# Altium PCB PCB1.PcbDoc
Units mil, origin at the board's own origin, x right, y up, seen from the top; angles counter-clockwise.
Board outline 2075 x 2850 mil, 2 copper layers (Top Layer, Bottom Layer); 26 components, 15 nets, 93 pads, 16 vias.
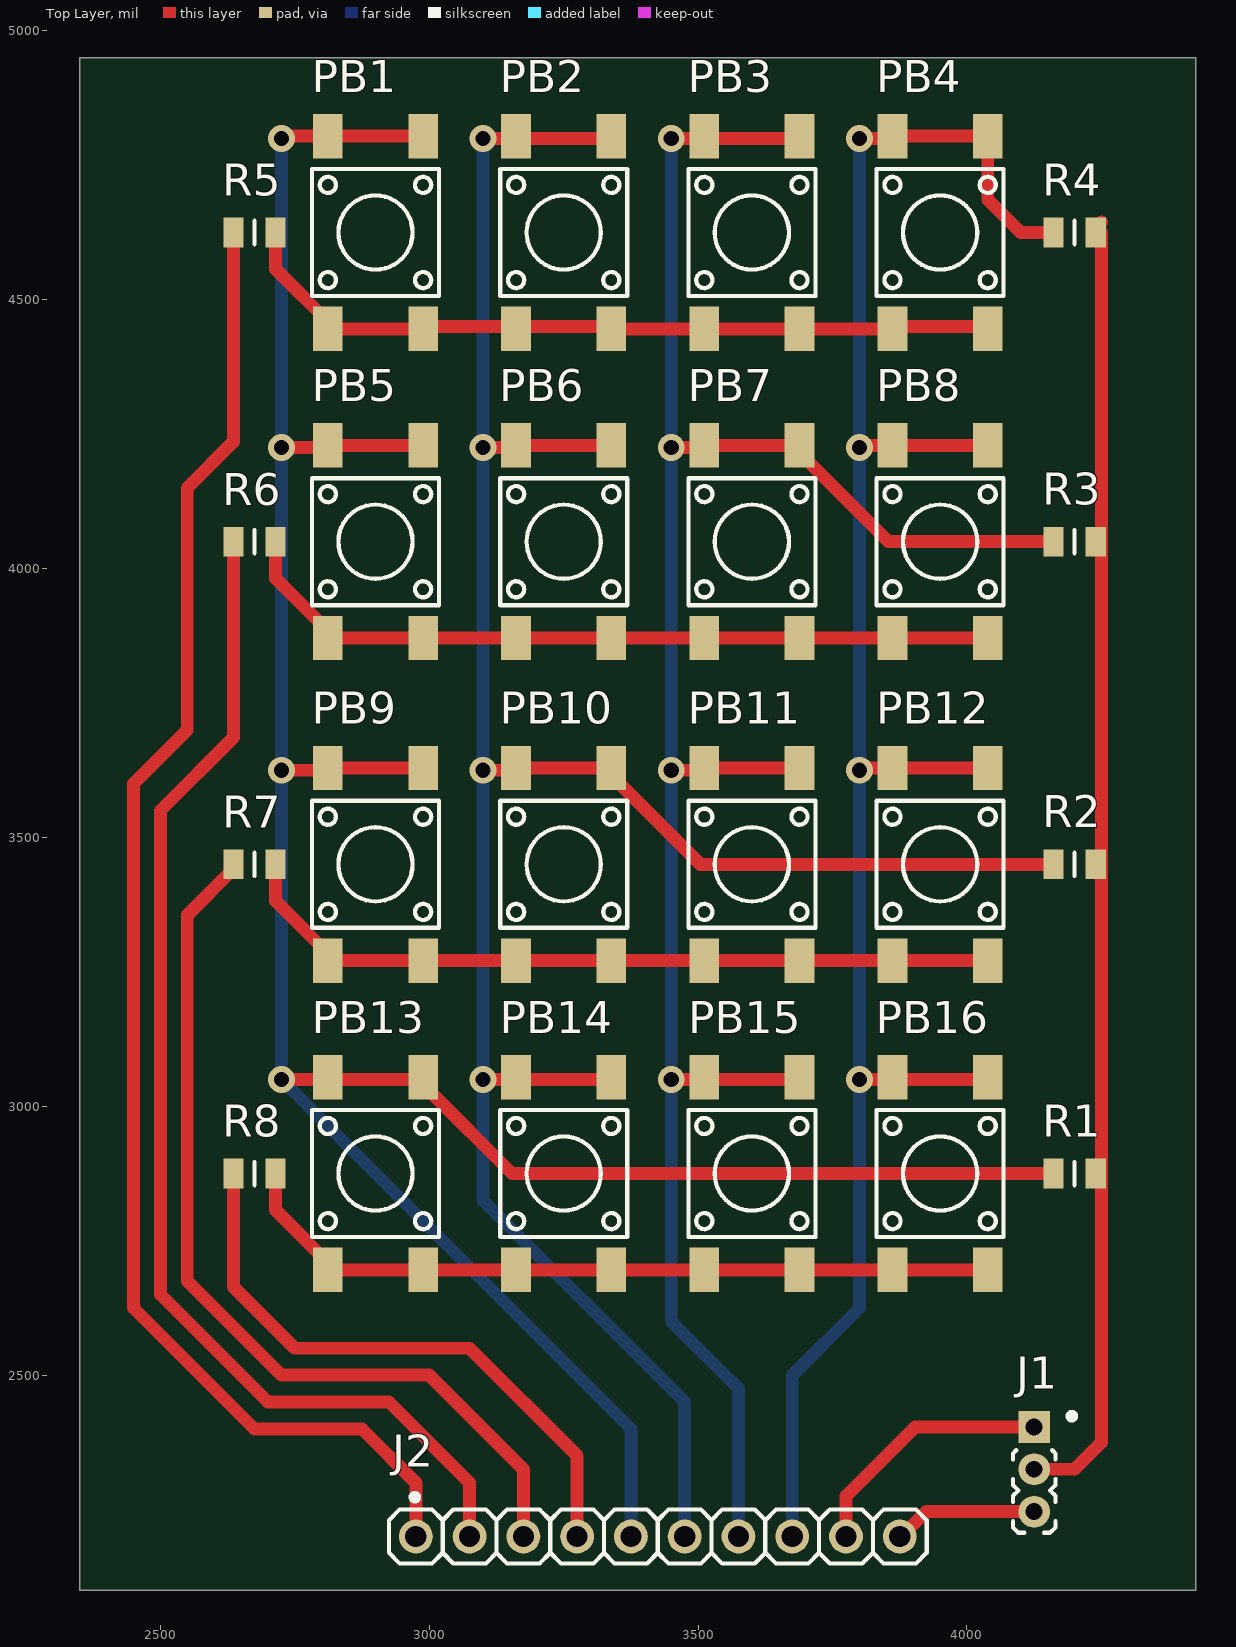
[diagram p0: Top Layer view]
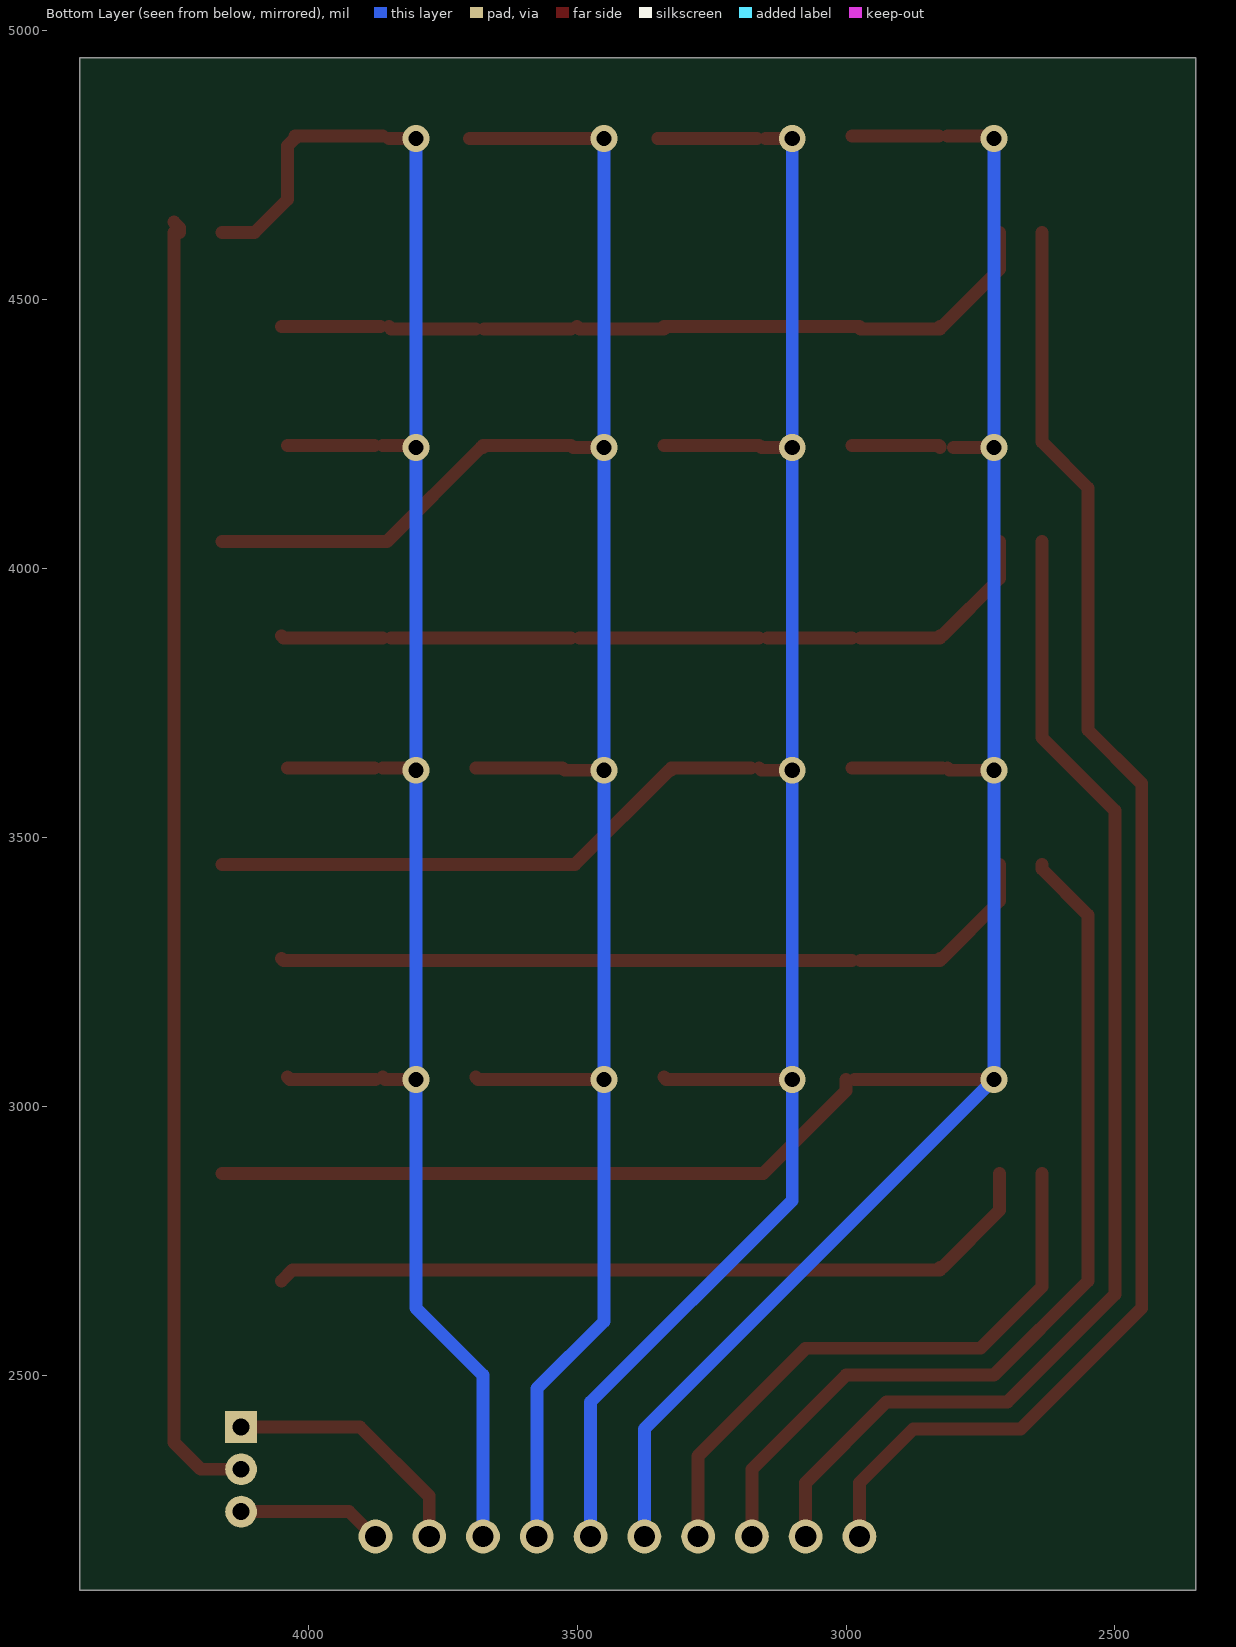
[diagram p1: Bottom Layer view, seen from below]
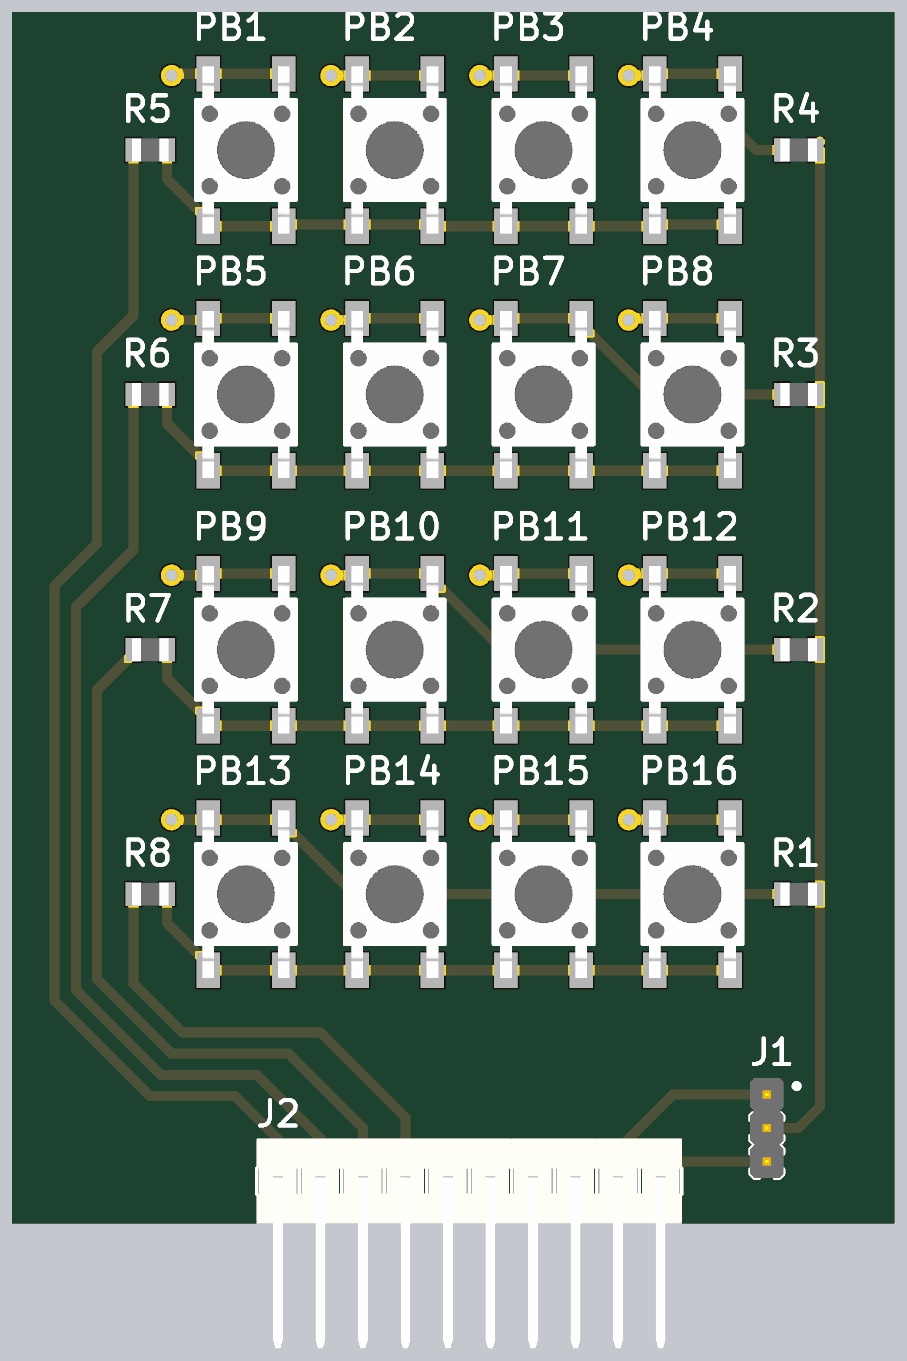
[diagram p2: 3D render of the assembled board from above, using the file's embedded part models]

## Layer stack, top to bottom
Top Solder: solder mask 0.4, Solder Resist, Dk 3.5
Top Layer: signal copper 1.4
Dielectric 1: dielectric 12.6, FR-4, Dk 4.8
Bottom Layer: signal copper 1.4
Bottom Solder: solder mask 0.4, Solder Resist, Dk 3.5

## Board outline
2350,2100 2350,4950 4425,4950 4425,2100

## Design rules (kind name [scope] priority, off if disabled: settings)
Clearance [All] p1: gap=10 ignorepadtopadclearanceinfootprint=FALSE except(0: Arc-Hole Track-Hole SMDPad-Hole THPad-Hole Via-Hole Fill-Hole Poly-Hole Region-Hole Text-Hole)
PolygonConnect [All] p1: connectstyle=Relief reliefconductorwidth=10 reliefentries=4 polygonreliefangle="90 Angle" airgapwidth=10
RoutingVias [All] p1: holewidth=28 width=50 viastyle="Through Hole" minholewidth=28 minwidth=50 maxholewidth=28 maxwidth=50
SolderMaskExpansion [All] p1: expansion=4 istentingtop=FALSE
Width [All] p1: maxlimit=50 minlimit=10 preferedwidth=24 minimp=50.000000 maximp=50.000000 favimp=50.000000
30 further rules are at their usual default settings.

## Components (designator, comment, footprint, x,y, rotation, side; value= is the part's Value field where it differs from the comment)
J1 "" HARWIN_M22-2010305 4125,2403.74 r270 top
J2 "" SIP10 2975,2200 r0 top
PB1 "" PB_TYCO_FSM6JSMA 2900,4625 r0 top
PB2 "" PB_TYCO_FSM6JSMA 3250,4625 r0 top
PB3 "" PB_TYCO_FSM6JSMA 3600,4625 r0 top
PB4 "" PB_TYCO_FSM6JSMA 3950,4625 r0 top
PB5 "" PB_TYCO_FSM6JSMA 2900,4050 r0 top
PB6 "" PB_TYCO_FSM6JSMA 3250,4050 r0 top
PB7 "" PB_TYCO_FSM6JSMA 3600,4050 r0 top
PB8 "" PB_TYCO_FSM6JSMA 3950,4050 r0 top
PB9 "" PB_TYCO_FSM6JSMA 2900,3450 r0 top
PB10 "" PB_TYCO_FSM6JSMA 3250,3450 r0 top
PB11 "" PB_TYCO_FSM6JSMA 3600,3450 r0 top
PB12 "" PB_TYCO_FSM6JSMA 3950,3450 r0 top
PB13 "" PB_TYCO_FSM6JSMA 2900,2875 r0 top
PB14 "" PB_TYCO_FSM6JSMA 3250,2875 r0 top
PB15 "" PB_TYCO_FSM6JSMA 3600,2875 r0 top
PB16 "" PB_TYCO_FSM6JSMA 3950,2875 r0 top
R1 "10K" RESC2012X60N 4200,2875 r0 top
R2 "10K" RESC2012X60N 4200,3450 r0 top
R3 "10K" RESC2012X60N 4200,4050 r0 top
R4 "10K" RESC2012X60N 4200,4625 r0 top
R5 "330" RESC2012X60N 2675,4625 r180 top
R6 "330" RESC2012X60N 2675,4050 r180 top
R7 "330" RESC2012X60N 2675,3450 r180 top
R8 "330" RESC2012X60N 2675,2875 r180 top

## Footprints (in the part's own frame and the unit in brackets; to place one, negate y for a bottom-side part, rotate by r counter-clockwise, add the part's x,y. Pads: shape width x height; smd on the part's side, far side on the other; paste and mask are expansions set on the pad)
HARWIN_M22-2010305 [mm] "3 Contacts - Pitch 2mm - Single Row Through Mount Straight Header (Post Lead = 3.5mm, Tail Lead 3.4mm, Insulator 1.5mm)"
  rect 1.5x1.5 hole 0.8: 1(0,0)
  round 1.5 hole 0.8: 2(2,0) 3(4,0)
  silkscreen extent -0.66,-1 5,1.93, body extent -1,-1 5,1, height 5
PB_TYCO_FSM6JSMA [mm] "Body 6mm x 6mm, Surface Mount Tactile Switches, TYCO FSM6JSMA Series"
  rect 1.4x2.1 smd: 1(-2.25,4.55) 2(-2.25,-4.55) 3(2.25,4.55) 4(2.25,-4.55)
  silkscreen extent -3,-3 3,3, body extent -3,-5 3,5, height 7.11
RESC2012X60N [mm] "Chip Resistor, EIA 0805, Metric 2012, Body 2.0x1.2mm, IPC Medium Density"
  rect 0.95x1.4 smd: 1(-1,0) 2(1,0)
  silkscreen extent 0,-0.55 0,0.55, body extent -1.1,-0.67 1.1,0.68, height 0.6
SIP10 [mm] "10 Contact 2.54mm Pitch Single-In-Line Header Strip - Top Pin Ø0.46mm - Bottom Pin Ø0.69mm"
  round 1.6 hole 1: 1(0,0) 2(2.54,0) 3(5.08,0) 4(7.62,0) 5(10.16,0) 6(12.7,0) 7(15.24,0) 8(17.78,0) 9(20.32,0) 10(22.86,0)
  silkscreen extent -1.27,-1.27 24.13,2, body extent -1.27,-10 24.13,2.54, height 4.5

## Part data
J1: library part "Connector 3 Male", "Connector 3 Male"
J2: library part "Connector 10 Male", "Connector 10 Male"
PB1 PB2 PB3 PB4 PB5 PB6 PB7 PB8 PB9 PB10 PB11 PB12 PB13 PB14 PB15 PB16: library part "PB SPST 1NO-2NO 34CASE", "Push-Button Switch SPDT"
R1 R2 R3 R4 R5 R6 R7 R8: library part Resistor, "Resistor"

## Via types
v1: diameter 50, hole 28, Top Layer to Bottom Layer, 16 vias

## Nets (pads, with @x,y where several pads share a name; then routed paths per layer and width w, separated by ;. In a path a pad name is that pad's centre, name@x,y a point inside that pad or via, vN(x,y) a via of type N, cw(c..) or ccw(c..) an arc to the next point about the centre after c; other vN are vias at no path point)
GND: J1.1 J2.9 | length 478.3
  Top Layer w24: J2.9 3775,2275 3903.74,2403.74 J1.1
NetJ1_2: J1.2 R1.2 R2.2 R3.2 R4.2 | length 2419.6
  Top Layer w24: J1.2 4200,2325 4250,2375 4250,3450 4250,4050 R4.2@4250,4625 ; R4.2 4239.37,4633.86 R4.2@4250,4644.49
NetJ2_1: J2.1 R5.2 | length 2836.5
  Top Layer w24: R5.2 2635.63,4235.63 2550,4150 2550,3700 2450,3600 2450,2625 2675,2400 2875,2400 2975,2300 J2.1
NetJ2_2: J2.2 R6.2 | length 2276.2
  Top Layer w24: R6.2 2635.63,3685.63 2500,3550 2500,2650 2700,2450 2925,2450 3075,2300 J2.2
NetJ2_3: J2.3 R7.2 | length 1705.4
  Top Layer w24: R7.2 2635.63,3441.14 2550,3355.51 2550,2675 2725,2500 3000,2500 3175,2325 J2.3
NetJ2_4: J2.4 R8.2 | length 1130.2
  Top Layer w24: R8.2 2635.63,2664.37 2750,2550 3075,2550 3275,2350 J2.4
NetJ2_5: J2.5 PB1.1 PB1.3 PB5.1 PB5.3 PB9.1 PB9.3 PB13.1 PB13.3 R1.1 | length 5121.3
  Top Layer w24: v1(2725,3050) PB13.3@2984.45,3050 ; v1(2725,3625) 2807.28,3625 PB9.1 ; v1(2725,4225) PB5.1@2800,4225 ; v1(2725,4800) 2729.13,4804.13 PB1.1 ; PB9.1@2820.87,3629.13 PB9.3 ; PB5.1@2825,4225 2825,4227.16 2826.98,4229.13 PB5.3 ; PB1.1@2826.98,4804.13 PB1.3 ; PB13.3@3000,3050 3000,3028.94 3153.94,2875 R1.1
  Bottom Layer w24: v1(2725,4800) v1(2725,4225) v1(2725,3625) v1(2725,3050) 3375,2400 J2.5
NetJ2_6: J2.6 PB2.1 PB2.3 PB6.1 PB6.3 PB10.1 PB10.3 PB14.1 PB14.3 R2.1 | length 4589.6
  Top Layer w24: v1(3100,3050) 3334.45,3050 PB14.3 ; v1(3100,3625) 3157.28,3625 PB10.1 ; v1(3100,4225) 3157.28,4225 PB6.1 PB6.3 ; v1(3100,4800) PB2.1@3150,4800 ; PB2.1@3165.55,4800 PB2.3@3350,4800 ; PB10.1@3176.98,3629.13 PB10.3@3325,3629.13 ; PB10.3@3325,3625 3328.94,3625 3503.94,3450 R2.1
  Bottom Layer w24: v1(3100,4800) v1(3100,4225) v1(3100,3625) v1(3100,3050) 3100,2825 3475,2450 J2.6
NetJ2_7: J2.7 PB3.1 PB3.3 PB7.1 PB7.3 PB11.1 PB11.3 PB15.1 PB15.3 R3.1 | length 4167.2
  Top Layer w24: v1(3450,3050) 3684.45,3050 PB15.3 ; v1(3450,3625) 3522.84,3625 3526.98,3629.13 PB11.3 ; v1(3450,4225) 3507.28,4225 PB7.1 PB7.3@3675,4229.13 ; v1(3450,4800) PB3.3@3700,4800 ; PB7.3@3675,4225 3678.94,4225 3853.94,4050 R3.1
  Bottom Layer w24: v1(3450,4800) v1(3450,4225) v1(3450,3625) v1(3450,3050) 3450,2600 3575,2475 J2.7
NetJ2_8: J2.8 PB4.1 PB4.3 PB8.1 PB8.3 PB12.1 PB12.3 PB16.1 PB16.3 R4.1 | length 3810
  Top Layer w24: v1(3800,3050) 3857.28,3050 PB16.1 ; v1(3800,3625) 3804.13,3629.13 PB12.1 ; v1(3800,4225) 3804.13,4229.13 PB8.1 ; v1(3800,4800) PB4.1@3850,4800 ; PB4.1 PB4.3@4025,4804.13 ; PB16.1@3875,3050 4034.45,3050 PB16.3 ; PB12.1@3876.98,3629.13 PB12.3 ; PB8.1@3876.98,4229.13 PB8.3 ; PB4.3@4025,4800 4038.58,4786.42 4038.58,4686.42 4100,4625 R4.1
  Bottom Layer w24: J2.8 3675,2500 3800,2625 v1(3800,3050) v1(3800,3625) v1(3800,4225) v1(3800,4800)
NetPB1_2: PB1.2 PB1.4 PB2.2 PB2.4 PB3.2 PB3.4 PB4.2 PB4.4 R5.1 | length 1412
  Top Layer w24: R5.1 2714.37,4556.69 2821.06,4450 PB1.2@2825,4450 ; PB1.2@2825,4445.87 2973.02,4445.87 2975,4447.84 2975,4450 PB2.4@3338.58,4450 ; PB2.4 3495.87,4445.87 PB3.2@3500,4450 ; PB3.2 PB3.4@3673.02,4445.87 ; PB3.4 3845.87,4445.87 PB4.2@3850,4450 ; PB4.2@3865.55,4450 PB4.4@4050,4450
NetPB5_2: PB5.2 PB5.4 PB6.2 PB6.4 PB7.2 PB7.4 PB8.2 PB8.4 R6.1 | length 1387.6
  Top Layer w24: R6.1 2714.37,3981.69 2821.06,3875 PB5.2@2825,3875 ; PB5.2@2825,3870.87 PB5.4@2973.02,3870.87 ; PB5.4 PB6.2@3145.87,3870.87 ; PB6.2 PB6.4 PB7.2@3495.86,3870.87 ; PB7.2 PB7.4 PB8.2@3845.87,3870.87 ; PB8.2 PB8.4 4045.87,3870.87 PB8.4@4050,3875
NetPB9_2: PB9.2 PB9.4 PB10.2 PB10.4 PB11.2 PB11.4 PB12.2 PB12.4 R7.1 | length 1434.3
  Top Layer w24: R7.1 2714.37,3381.69 2821.06,3275 PB9.2@2825,3275 ; PB9.2@2825,3270.87 PB9.4@2973.02,3270.87 ; PB9.4 PB10.2 PB10.4 PB11.2 PB11.4 PB12.2 PB12.4 4045.87,3270.87 PB12.4@4050,3275
NetPB13_2: PB13.2 PB13.4 PB14.2 PB14.4 PB15.2 PB15.4 PB16.2 PB16.4 R8.1 | length 1456.8
  Top Layer w24: R8.1 2714.37,2806.69 2821.06,2700 PB13.2@2825,2700 ; PB13.2@2825,2695.87 PB13.4 PB14.2 PB14.4 PB15.2 PB15.4 PB16.2 4029.13,2695.87 PB16.4@4050,2675
VCC: J1.3 J2.10 | length 269.2
  Top Layer w24: J2.10 3877.93,2200 3924.19,2246.26 J1.3

## Silkscreen, mask and mechanical layers (free items; w line width, h text height)
Mechanical 1:
  the board outline again, w10